# EAGLE board 2. prototipus - SMD (EAGLE 7.2.0)
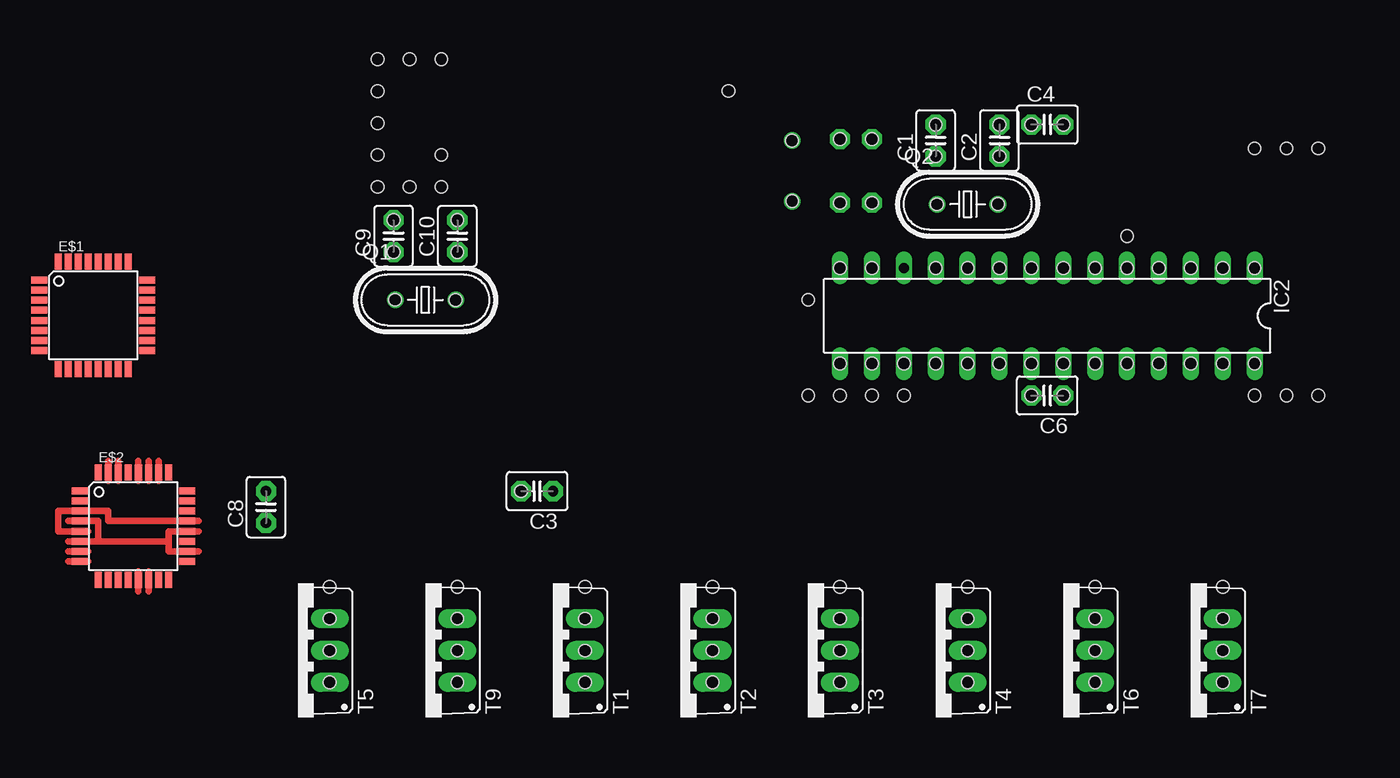
[diagram p0: board, top side]
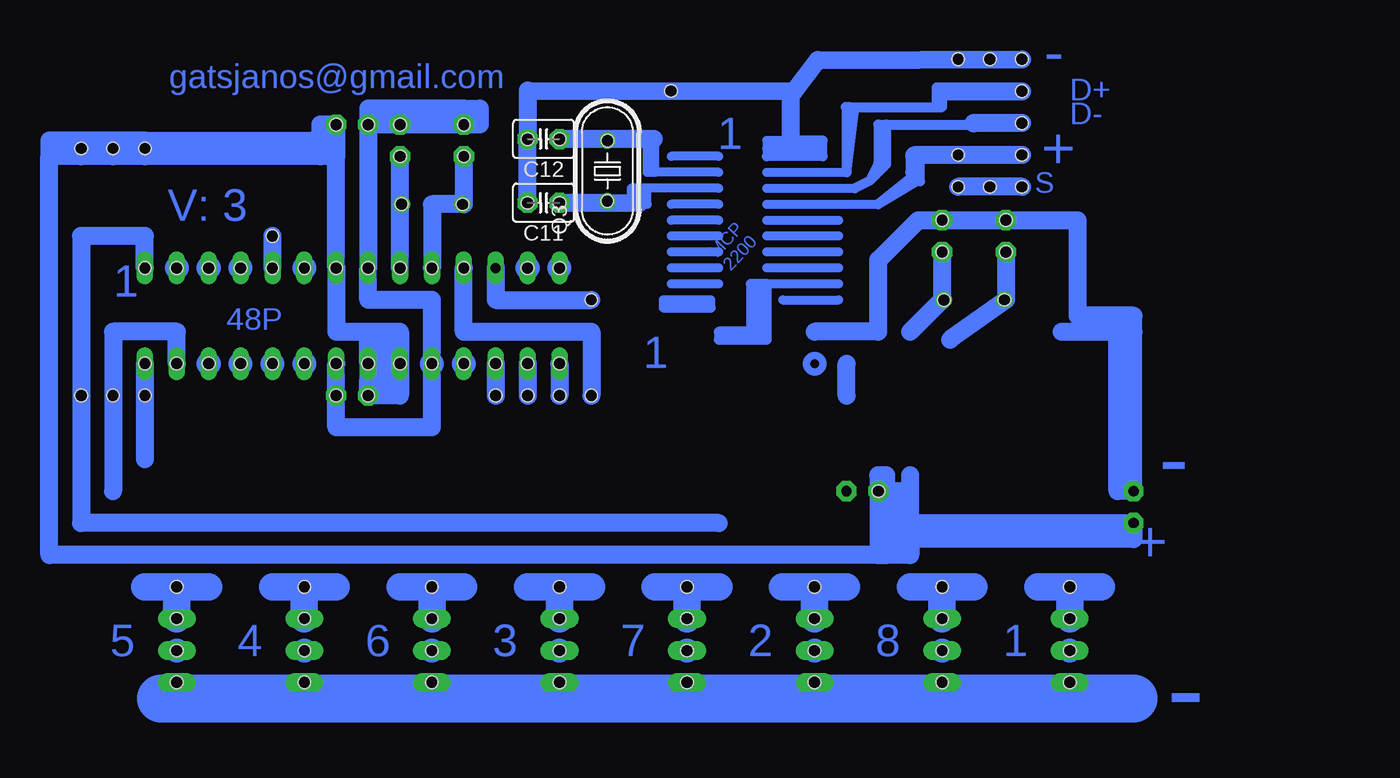
[diagram p1: board, bottom side, seen from below]

No outline drawn. Coordinates in mm, seen from the top.
Copper layers (1*16): Top 0.035mm / dielectric 1.5mm / Bottom 0.035mm
Design rules "default": minimum track width 10mil, minimum drill 24mil, track to track 8mil, track to pad 8mil, pad to pad 8mil, via to via 8mil, smd to smd 8mil, copper to edge 40mil, drill to drill 8mil, minimum pad ring 10mil, minimum via ring 8mil, stop-mask expansion 4mil, vias tented up to drill 0mil, thermal gap 10mil
Holes 1 mm at 88.9,29.21 91.44,29.21 78.74,41.91 86.36,13.97 76.2,13.97 66.04,13.97 55.88,13.97 45.72,13.97 35.56,13.97 25.4,13.97 15.24,13.97 55.88,29.21 58.42,29.21 60.96,29.21 53.34,36.83 53.34,29.21 88.9,48.9 24.13,55.99 24.13,48.37 19.05,55.99 19.05,53.45 19.05,50.91 19.05,48.37 19.05,45.83 21.59,45.83 24.13,45.83 21.59,55.99 47.01,53.48 58.42,49.64 58.42,44.56 55.88,44.56 55.88,49.64 52.06,49.51 52.07,44.69 20.32,43.18 20.32,40.64 25.4,40.64 25.4,43.18 25.27,36.82 20.44,36.83 63.5,48.26 63.5,50.8 68.58,50.8 68.58,48.26 68.45,44.45 63.61,44.43 66.04,39.37 68.58,39.37 71.12,39.37 55.88,31.75 58.42,31.75 60.96,31.75 63.5,31.75 66.04,31.75 68.58,31.75 71.12,31.75 73.66,31.75 76.2,31.75 78.74,31.75 81.28,31.75 83.82,31.75 86.36,31.75 88.9,31.75 88.9,39.37 86.36,39.37 83.82,39.37 81.28,39.37 78.74,39.37 76.2,39.37 73.66,39.37 63.5,39.37 58.42,39.37 55.88,39.37 15.24,11.43 15.24,8.89 15.24,6.35 25.4,6.35 25.4,8.89 25.4,11.43 35.56,11.43 35.56,8.89 35.56,6.35 45.72,6.35 45.72,8.89 45.72,11.43 55.88,11.43 55.88,8.89 55.88,6.35 66.04,6.35 66.04,8.89 66.04,11.43 76.2,11.43 76.2,8.89 76.2,6.35 86.36,6.35 86.36,8.89 86.36,11.43 71.12,50.8 73.66,50.8 30.48,21.59 93.98,29.21 93.98,48.9 91.44,48.9 71.12,29.21 73.66,29.21
tKeepout: 2 lines
vRestrict: area 36.2,36.2 to 47,49.5

## Footprints (pad centres in the part's own frame; a part is rotated, then mirrored left to right if it is on the bottom)
C2.5-3 = drill 0.813 pad 1.6 octagon: 1 -1.27,0; 2 1.27,0
TQFP32-08 = smd 1.27 x 0.559: 1 -4.293,2.8; 2 -4.293,2; 3 -4.293,1.2; 4 -4.293,0.4; 5 -4.293,-0.4; 6 -4.293,-1.2; 7 -4.293,-2; 8 -4.293,-2.8; 17 4.293,-2.8; 18 4.293,-2; 19 4.293,-1.2; 20 4.293,-0.4; 21 4.293,0.4; 22 4.293,1.2; 23 4.293,2; 24 4.293,2.8 | smd 0.559 x 1.27: 9 -2.8,-4.293; 10 -2,-4.293; 11 -1.2,-4.293; 12 -0.4,-4.293; 13 0.4,-4.293; 14 1.2,-4.293; 15 2,-4.293; 16 2.8,-4.293; 25 2.8,4.293; 26 2,4.293; 27 1.2,4.293; 28 0.4,4.293; 29 -0.4,4.293; 30 -1.2,4.293; 31 -2,4.293; 32 -2.8,4.293
DIL28-3 = drill 0.813 long: 1 -16.51,-3.81; 2 -13.97,-3.81; 3 -11.43,-3.81; 4 -8.89,-3.81; 5 -6.35,-3.81; 6 -3.81,-3.81; 7 -1.27,-3.81; 8 1.27,-3.81; 9 3.81,-3.81; 10 6.35,-3.81; 11 8.89,-3.81; 12 11.43,-3.81; 13 13.97,-3.81; 14 16.51,-3.81; 15 16.51,3.81; 16 13.97,3.81; 17 11.43,3.81; 18 8.89,3.81; 19 6.35,3.81; 20 3.81,3.81; 21 1.27,3.81; 22 -1.27,3.81; 23 -3.81,3.81; 24 -6.35,3.81; 25 -8.89,3.81; 26 -11.43,3.81; 27 -13.97,3.81; 28 -16.51,3.81
HC49U70 = drill 0.813: 1 -2.413,0; 2 2.413,0
TO220BV = drill 1.016 long: 1 -2.54,-2.54; 2 0,-2.54; 3 2.54,-2.54

## Placement (x,y rotation side)
C1  [C2.5-3]  63.5,49.53 90 top
C2  [C2.5-3]  68.58,49.53 90 top
C3  [C2.5-3]  31.75,21.59 180 top
C4  [C2.5-3]  72.39,50.8 0 top
C6  [C2.5-3]  72.39,29.21 180 top
C8  [C2.5-3]  10.16,20.32 90 top
C9  [C2.5-3]  20.32,41.91 90 top
C10  [C2.5-3]  25.4,41.91 90 top
C11  [C2.5-3]  57.15,44.56 180 bottom
C12  [C2.5-3]  57.15,49.64 180 bottom
E$1  [TQFP32-08]  -3.6,35.6 0 top
E$2  [TQFP32-08]  -0.4,18.8 0 top
IC2  [DIL28-3]  72.39,35.56 180 top
Q1  [HC49U70]  22.86,36.83 0 top
Q2  [HC49U70]  66.04,44.45 0 top
Q3  [HC49U70]  52.07,47.1 90 bottom
T1  2SC1306  [TO220BV]  33.02,8.89 90 top
T2  2SC1306  [TO220BV]  43.18,8.89 90 top
T3  2SC1306  [TO220BV]  53.34,8.89 90 top
T4  2SC1306  [TO220BV]  63.5,8.89 90 top
T5  2SC1306  [TO220BV]  12.7,8.89 90 top
T6  2SC1306  [TO220BV]  73.66,8.89 90 top
T7  2SC1306  [TO220BV]  83.82,8.89 90 top
T9  2SC1306  [TO220BV]  22.86,8.89 90 top

## Library data of the parts
C1-C4 C6 C8-C12 = capacitor-wima
E$1 E$2 = atmel
IC2 = ic-package
Q1-Q3 = crystal; OC_FARNELL: unknown; OC_NEWARK: unknown
T1-T7 T9 = transistor-neu-to92

## Nets
GND: C9.2 C10.2
N$1: IC2.7 IC2.20 IC2.21
S$1: IC2.27
S$2: C2.1 IC2.9
S$3: C1.1 IC2.10
S$4: IC2.1
S$5: C10.1
S$6: C9.1
S$8: C1.2 C2.2 IC2.8 IC2.22
S$10: T5.3
S$11: T9.3
S$12: T1.3
S$13: T2.3
S$14: T3.3
S$15: T4.3
S$16: T6.3
S$17: T7.3
S$19: IC2.11
S$20: IC2.12
S$21: IC2.15
S$22: IC2.16
S$23: IC2.17
S$24: IC2.5
S$28: IC2.28
S$29: C11.2 C12.2
S$30: C11.1
S$68: C12.1

## Tracks (layer width: path | path; a pad name or v marks a point on that pad's centre or on a via)
GND
  Bottom 1.016: 27.3,43.18 C10.2 C9.2
  Bottom 1.422: 15.88,34.29 11.43,34.29 | 11.43,34.29 11.43,21.59 10.16,21.59 10.16,34.29 | 10.16,34.29 11.43,34.29 | 35.56,34.29 30.48,34.29 30.48,40.01 27.3,43.18 C9.2 14.61,43.18 14.61,35.56 10.16,35.56 10.16,34.29
N$1
  Bottom 1.422: 27.94,19.05 10.16,19.05 10.16,17.78 27.94,17.78 | 27.94,19.05 27.94,17.78 | 27.94,17.78 27.94,16.51 29.84,16.51 | 30.48,16.51 96.52,16.51 96.52,48.26 | 71.12,34.29 73.66,34.29 IC2.7 73.66,48.26 | 69.85,34.29 68.58,34.29 IC2.20 | IC2.21 69.85,31.75 | 69.85,31.75 IC2.20 | 73.66,48.26 74.93,48.26 | 74.93,48.26 88.9,48.26 | 88.9,48.26 91.44,48.26 | 91.44,48.26 93.98,48.26 | 93.98,48.26 96.52,48.26 | 73.66,48.26 73.66,50.8 74.93,50.8 74.93,48.26 | IC2.21 71.12,34.29 | 71.12,34.29 69.85,34.29 | 69.85,34.29 69.85,31.75 | 27.94,19.05 27.94,22.86 | 30.48,21.59 30.48,22.86 29.84,22.86 29.84,16.51 | 30.48,21.59 28.57,21.59 | 28.57,21.59 27.94,19.05 | 28.57,21.59 29.21,17.14 | 30.48,21.59 30.48,16.51 | 30.48,16.51 29.84,16.51 | IC2.20 IC2.21 | IC2.21 71.12,30.48 | 71.12,30.48 68.58,30.48 IC2.20 | 88.9,48.26 88.9,49.53 | 91.44,48.26 91.44,49.53 | 93.98,48.26 93.98,49.53 | 88.9,49.53 93.98,49.53 | 88.9,49.53 75.56,49.53 | 93.98,49.53 96.52,49.53 96.52,48.26 | IC2.20 68.58,29.21 71.12,29.21 71.12,30.48
S$1
  Bottom 1.422: IC2.27 86.36,34.29 91.44,34.29 91.44,21.59
S$2
  Bottom 1.422: IC2.9 C2.1
S$3
  Bottom 1.422: C1.1 63.5,44.45 66.04,44.45 IC2.10
S$4
  Bottom 1.422: IC2.1 88.9,41.91 93.98,41.91 93.98,19.05 43.18,19.05
S$5
  Bottom 1.422: C10.1 25.4,36.83 27.94,34.29
S$6
  Bottom 0.305: 20.32,36.83 20.95,36.83
  Bottom 1.422: C9.1 20.32,36.83 24.77,33.66
S$7
  Bottom 2.184: 17.78,13.97 12.7,13.97
S$8
  Bottom 1.016: 64.77,50.8 C2.2 71.12,50.8
  Bottom 1.422: 63.5,52.07 62.23,52.07 62.23,50.8 C1.2 | C1.2 63.5,52.07 | 63.5,52.07 64.77,52.07 | 64.77,52.07 71.12,52.07 71.12,50.8 | C1.2 64.77,50.8 | 64.77,52.07 64.77,50.8 | 64.77,50.8 71.12,50.8 | 71.12,50.8 IC2.8 71.12,36.83 66.04,36.83 66.04,26.67 73.66,26.67 IC2.22
S$9
  Top 0.5: -1.6,22.4 -1.6,24
S$10
  Bottom 2.184: 15.24,13.97 T5.3
S$11
  Bottom 2.184: 25.4,13.97 T9.3
S$12
  Bottom 2.184: 35.56,13.97 T1.3
S$13
  Bottom 2.184: 45.72,13.97 T2.3
S$14
  Bottom 2.184: 55.88,13.97 T3.3
S$15
  Bottom 2.184: 66.04,13.97 T4.3
S$16
  Bottom 2.184: 76.2,13.97 T6.3
S$17
  Bottom 2.184: 86.36,13.97 T7.3
S$18
  Bottom 3.81: 87.63,5.08 10.16,5.08
S$19
  Bottom 1.422: 53.34,29.21 53.34,34.29 63.5,34.29 IC2.11
S$20
  Bottom 1.422: IC2.12 60.96,36.83 53.34,36.83
S$21
  Bottom 1.422: IC2.15 55.88,29.21
S$22
  Bottom 1.422: IC2.16 58.42,29.21
S$23
  Bottom 1.422: IC2.17 60.96,29.21
S$24
  Bottom 1.422: IC2.5 78.74,41.91
S$25
  Bottom 2.184: 22.86,13.97 27.94,13.97 | 33.02,13.97 38.1,13.97 | 43.18,13.97 48.26,13.97 | 53.34,13.97 58.42,13.97 | 63.5,13.97 68.58,13.97 | 73.66,13.97 78.74,13.97 | 83.82,13.97 88.9,13.97
S$26
  Bottom 0.813: 25.83,52.43 25.83,53.76 25.1,53.76
S$27
  Bottom 0.7: 39.37,43.18 33.66,43.18
S$28
  Bottom 1.422: IC2.28 88.9,24.13
S$29
  Bottom 1.422: 19.05,55.99 35.31,55.94 37.19,53.44 58.4,53.5 C12.2 C11.2
S$30
  Bottom 1.422: C11.1 52.07,44.56 49.58,44.53
S$31
  Bottom 0.813: 33.08,52.18 25.4,52.18 25.4,53.45
  Bottom 1.422: 25.4,53.45 19.05,53.45
S$32
  Bottom 0.7: 43.18,46.99 48.26,46.99 | 48.26,46.99 48.26,49.53 48.9,49.53 48.9,46.99 48.26,46.99
  Bottom 0.813: 51.94,49.52 48.26,49.53
S$33
  Bottom 0.7: 33.66,41.91 39.37,41.91
S$34
  Bottom 0.7: 39.37,45.72 32.38,45.72
  Bottom 0.813: 30.48,47.76 30.48,50.8 29.84,50.8 | 29.84,50.8 29.84,47.62 31.11,46.35 | 29.84,50.8 22.86,50.8 | 32.38,45.72 31.11,46.35 | 31.11,46.35 30.48,47.62
S$35
  Bottom 1.422: 19.05,48.37 27.62,48.35
S$36
  Bottom 1.422: 19.05,50.91 22.88,50.91 22.88,50.9
S$37
  Bottom 1.422: 19.05,45.83 24.13,45.83
S$38
  Bottom 0.7: 43.81,36.83 47.62,36.83 47.62,36.2 45.72,36.2 43.81,36.2 43.81,36.83
  Bottom 0.813: 45.09,36.2 45.72,36.2
S$39
  Bottom 0.7: 33.66,40.64 39.37,40.64
S$40
  Bottom 0.7: 33.66,39.37 39.37,39.37
S$41
  Bottom 0.7: 38.1,36.83 33.66,36.83
S$42
  Bottom 0.7: 33.66,38.1 39.37,38.1
  Bottom 0.813: 40.01,33.66 43.18,33.66 43.18,34.29 40.64,34.29 | 40.01,33.66 40.01,34.29 | 40.01,34.29 40.01,37.47 | 40.01,34.29 40.64,34.29 | 40.01,33.66 39.37,33.66 39.37,38.1 40.64,38.1 40.64,34.29
S$43
  Bottom 0.813: 43.81,36.2 45.72,36.2
S$44
  Bottom 0.7: 37.47,48.9 39.37,48.9 | 39.37,48.9 39.37,48.26 | 37.47,49.53 39.37,49.53 39.37,48.9
  Bottom 0.813: 39.37,48.26 34.92,48.26 34.92,49.53 36.83,49.53 36.83,48.9 35.56,48.9
  Bottom 1.422: 37.47,53.34 37.47,49.53 37.47,48.9
S$45
  Bottom 0.813: 32.79,52.19 32.81,52.19
S$46
  Bottom 1.422: 33.02,29.21 33.02,31.75
S$48
  Bottom 0.7: 43.18,48.26 46.99,48.26
S$49
  Bottom 0.7: 43.18,44.45 46.99,44.45
S$50
  Bottom 0.7: 39.37,46.99 33.02,46.99
  Bottom 0.813: 33.02,46.99 32.38,52.07 33.02,52.07 33.02,46.99
S$51
  Bottom 0.7: 43.18,43.18 46.99,43.18
S$52
  Bottom 0.7: 43.18,41.91 46.99,41.91
S$53
  Bottom 0.7: 43.18,40.64 46.99,40.64
S$54
  Bottom 0.7: 43.18,39.37 46.99,39.37
S$55
  Bottom 0.7: 43.18,38.1 46.99,38.1
S$56
  Top 0.5: -2.4,22.4 -2.4,24
S$57
  Top 0.5: -4,18.4 -6.4,18.4 -6.4,20 -2.4,20 -2.4,19.2 4.8,19.2
S$58
  Top 0.5: -5.6,19.2 -3.2,19.2 -3.2,17.6 | -5.6,17.6 -3.2,17.6 | 4.8,18.4 2.4,18.4 2.4,17.6 | 2.4,17.6 2.4,16.8 4.8,16.8 | -3.2,17.6 2.4,17.6
S$62
  Top 0.5: -4,16.8 -5.6,16.8
S$63
  Top 0.5: -4,16 -5.6,16
S$64
  Top 0.5: 0.8,15.2 0.8,13.6
S$65
  Top 0.5: 0,15.2 0,13.6
S$68
  Bottom 1.422: 48.38,49.65 C12.1
S$69
  Top 0.5: 1.6,22.4 1.6,24
S$70
  Top 0.5: 0.8,22.4 0.8,24
S$71
  Top 0.5: 0,22.4 0,24
S$72
  Bottom 0.813: 27.16,46.27 27.16,48.44 26.51,48.44
S$73
  Bottom 0.7: 43.18,45.72 48.9,45.72 | 48.9,45.72 49.53,45.72 | 49.53,45.72 49.53,44.45 48.9,44.45 48.9,45.72 | 49.53,45.72 50.16,45.72 50.16,45.09
S$74
  Bottom 0.7: 39.37,44.45 30.48,44.45
  Bottom 0.813: 27.3,46.35 30.48,44.45 27.3,46.99
S$75
  Bottom 0.813: 27.94,48.26 27.94,46.99
(copper drawn outside any net)
  shapes: Bottom circle x21

## Text on the board
Bottom: - | gatsjanos@gmail.com | D+ | D- | 1 | + | S | V: 3 | MCP / 2200 | 1 | 48P | 1 | - | + | 1 | 8 | 2 | 7 | 3 | 6 | 4 | 5 | -
Unrouted: M8